# Altium PCB ShutdownBoard.PcbDoc (part 2 of 2)
Units mil, origin at the board's own origin, x right, y up, seen from the top; angles counter-clockwise.
Board outline 4429.13 x 4429.13 mil, 2 copper layers (Top Layer, Bottom Layer), stack 61.8 mil thick; 127 components, 112 nets, 478 pads, 128 vias.
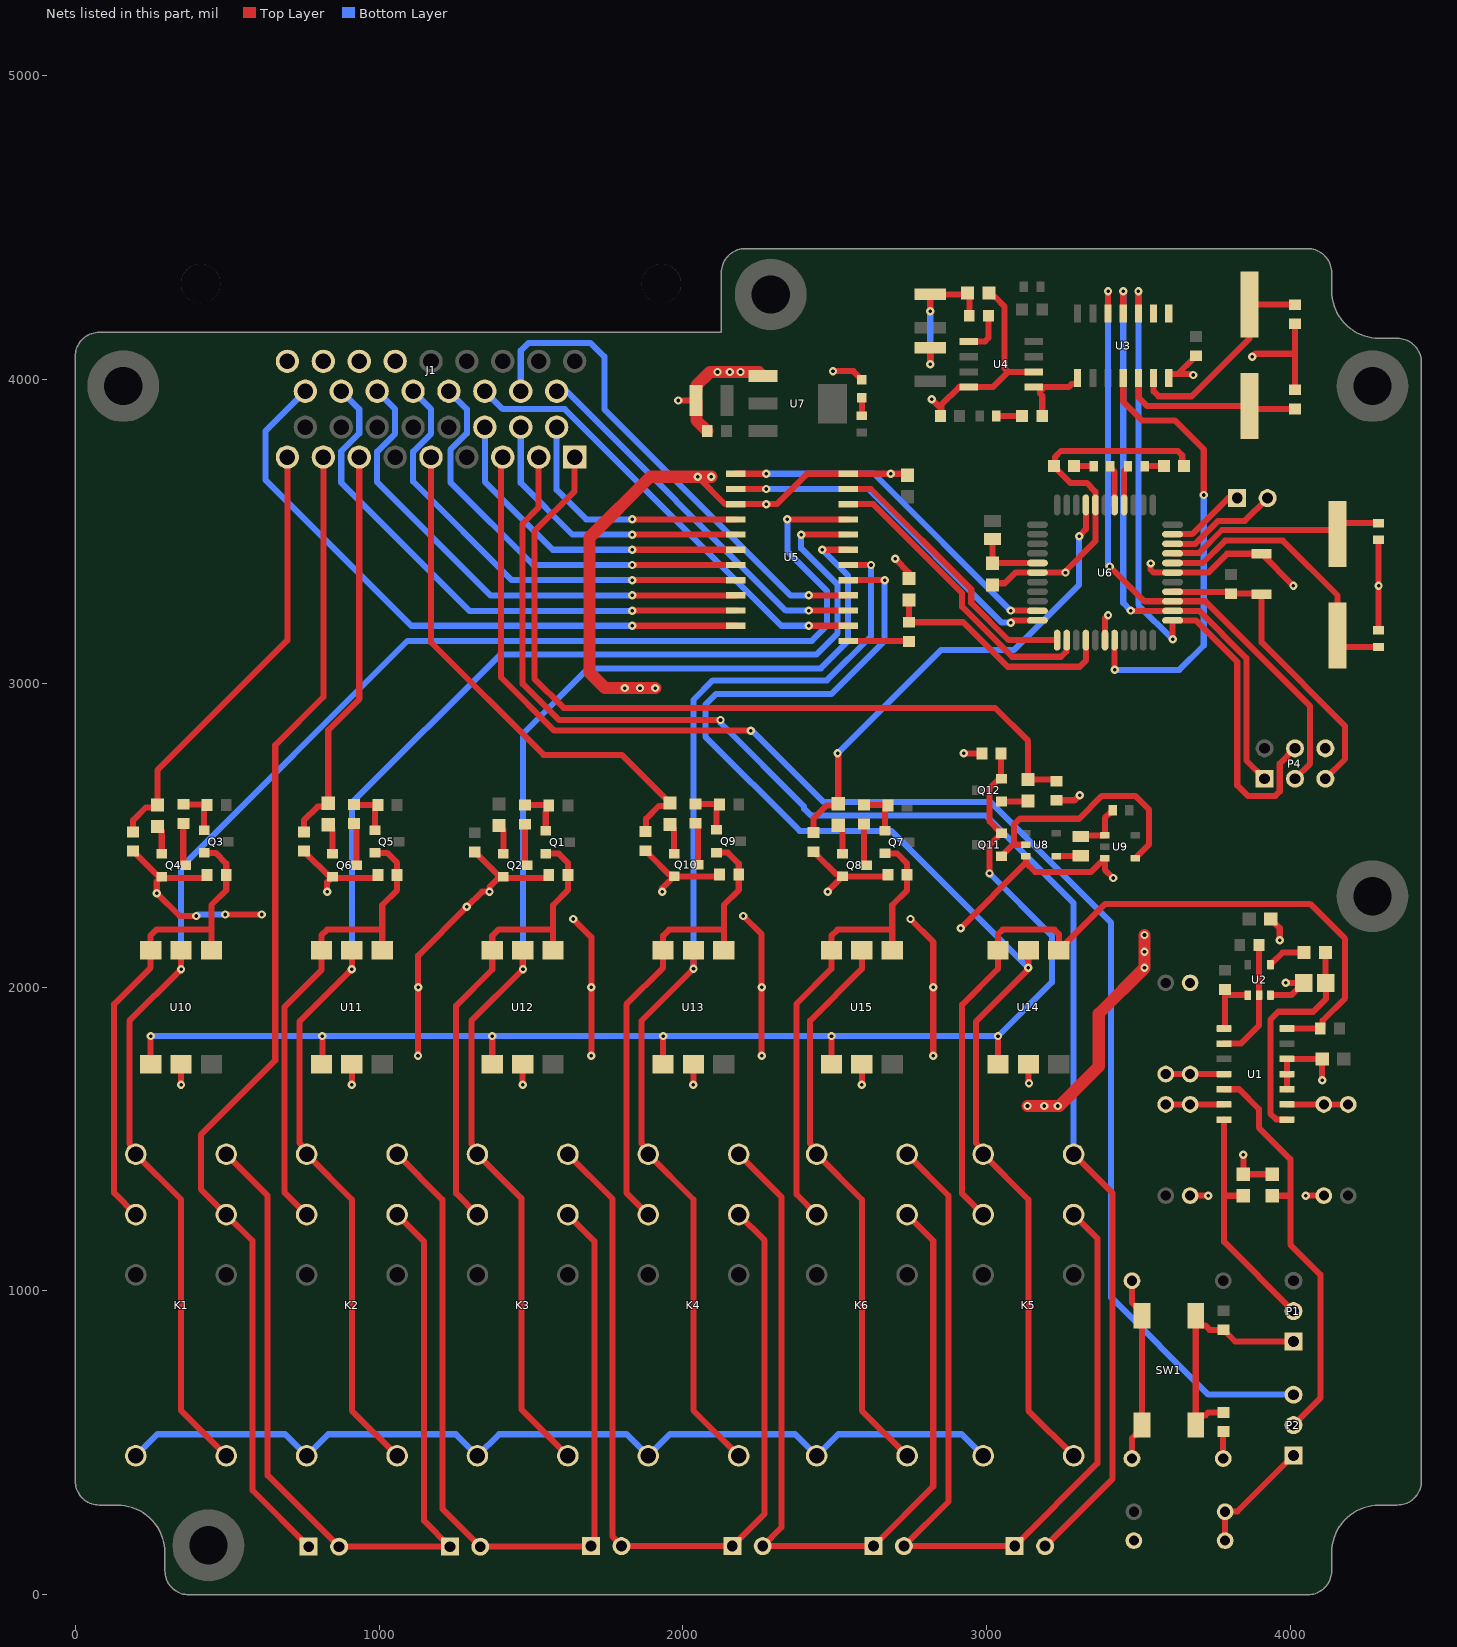
[diagram p2: the nets of this part, all layers, seen from the top]

## Via types
v1: diameter 27.56, hole 11.81, Top Layer to Bottom Layer, 128 vias

## Nets (pads, with @x,y where several pads share a name; then routed paths per layer and width w, separated by ;. In a path a pad name is that pad's centre, name@x,y a point inside that pad or via, vN(x,y) a via of type N, cw(c..) or ccw(c..) an arc to the next point about the centre after c; other vN are vias at no path point) (continued)
CAN_SPLIT: C12.2 R22.2 R23.1 R24.1 | length 487.3
  Top Layer w20: v1(2813.5,4048.6) R23.1@2813.5,4103.72 ; v1(2813.5,4223.6) R24.1@2813.5,4278.72 2931.14,4278.72 C12.2@2936.02,4283.6 2942.01,4277.62 R22.2@2942.01,4208.6
  Bottom Layer w20: v1(2813.5,4048.6) v1(2813.5,4223.6)
CAN_SPLIT_R: R22.1 U4.5 | length 142.2
  Top Layer w20: U4.5@2940.9,4123.6 2993.28,4123.6 3005,4135.32 R22.1@3005,4208.6
CAN_TX: LED1.2 U3.1 U4.1 | length 259.8
  Top Layer w20: U4.1@3153.5,3973.6 3172.2,3973.6 3174.01,3971.79 3174.01,3953.09 3181.97,3945.14 LED1.2@3181.97,3878.6 ; U4.1@3181.97,3967.07 3188.5,3973.6 3268.5,3973.6 3278.97,3984.08 3296.69,3984.08 3298.5,3985.89 U3.1@3298.5,4003.6
CAN_TX_LED: LED1.1 R25.2 | length 84
  Top Layer w20: R25.2@3031.06,3878.6 LED1.1@3115.04,3878.6
CAN_X1_20MHz: C13.2 U3.6 X1.1 | length 706.7
  Top Layer w20: U3.6@3548.5,4003.6 3548.5,3960.18 3565.08,3943.6 3673.5,3943.6 3863.5,4133.6 X1.1@3863.5,4245.93 3864.33,4245.1 C13.2@4013.5,4245.1
CAN_X2_20MHz: C14.1 U3.5 X1.2 | length 594.2
  Top Layer w20: U3.5@3498.5,4003.6 3498.5,3985.89 3500.31,3984.08 3500.31,3938.29 3527.32,3911.28 X1.2@3863.5,3911.28 3872.68,3902.11 C14.1@4013.5,3902.11
GND: C1.1 C2.1 C3.1 C4.1 C5.2 C6.1 C11.1 C12.1 C13.1 C14.2 C15.1 C16.1 C17.1 C18.1 C19.1 C20.1 DS1.2 J1.31 J1.32 J1.33 J1.34 K1.B K2.B K3.B K4.B K5.B K6.B LED3.2 LED4.2 P4.6 Q2.2 Q4.2 Q6.2 Q8.2 Q10.2 R3.1 R5.1 R8.1 R9.1 R11.1 R14.2 R19.1 R21.1 R28.1 R31.1 R33.1 R36.1 R38.1 R41.1 R44.1 R47.1 R49.1 R52.1 R54.1 SW2.1 U1.10 U1.11 U1.12 U2.3 U3.7 U4.2 U4.8 U5.12 U5.15 U6.6 U6.18 U6.28 U6.39 U7.1 U8.3 U9.3 U10.2 U11.2 U12.2 U13.2 U14.2 U15.2 | length 16312.6
  Top Layer w20: R33.1@190.82,2447.11 192.79,2447.11 200.51,2439.39 200.51,2437.42 Q4.2@274.84,2363.09 ; v1(348.5,1678.6) U10.2@348.5,1746.01 ; v1(398.5,2233.6) 343.5,2233.6 v1(268.5,2308.6) 268.5,2346.64 Q4.2@280.47,2358.6 ; R31.1@434.33,2368.6 424.33,2358.6 Q4.2@280.47,2358.6 ; v1(493.5,2238.6) v1(613.5,2238.6) ; R38.1@752.82,2447.11 754.79,2447.11 762.51,2439.39 762.51,2437.42 831.09,2368.84 841.21,2368.84 Q6.2@846.96,2363.09 ; v1(829.01,2313.6) 829.01,2345.14 Q6.2@846.96,2363.09 ; v1(910.5,1678.6) U11.2@910.5,1746.01 ; R36.1@996.33,2368.6 986.33,2358.6 851.45,2358.6 Q6.2@846.96,2363.09 ; v1(1128.11,1773.6) 1128.5,1774 v1(1128.5,1998.6) 1128.5,2103.05 v1(1289.05,2263.6) 1339.05,2313.6 v1(1363.5,2313.6) 1363.5,2329.13 Q2.2@1403.21,2368.84 ; R5.1@1314.82,2444.51 1316.79,2444.51 1324.51,2436.79 1324.51,2434.82 1390.49,2368.84 Q2.2@1403.21,2368.84 ; v1(1472.5,1678.6) U12.2@1472.5,1746.01 ; R3.1@1558.33,2368.6 1548.33,2358.6 1413.45,2358.6 Q2.2@1408.96,2363.09 Q2.2@1403.21,2368.84 ; v1(1638.5,2223.6) 1698.5,2163.6 v1(1698.5,1998.6) v1(1698.5,1773.6) ; R49.1@1876.82,2448.29 1878.79,2448.29 1886.51,2440.57 1886.51,2438.6 1955.09,2370.02 1965.21,2370.02 Q10.2@1970.96,2364.27 ; v1(1931.51,2313.6) 1931.51,2324.82 Q10.2@1970.96,2364.27 ; v1(1984.56,3929.67) C20.1@2042.32,3929.67 ; v1(2033.5,1678.6) 2034.5,1679.61 U13.2@2034.5,1746.01 ; v1(2048.5,3678.6) 2138.26,3588.84 2173.62,3588.84 U5.15@2173.86,3588.6 v1(2273.5,3588.6) 2308.5,3588.6 2408.5,3688.6 U5.12@2543.15,3688.6 v1(2683.5,3688.6) 2733.93,3688.6 C15.1@2738.5,3684.04 ; R47.1@2120.33,2369.79 2114.82,2364.27 Q10.2@1970.96,2364.27 ; v1(2198.5,2233.6) 2258.5,2173.6 v1(2258.5,1998.6) v1(2258.5,1773.6) ; R44.1@2429.49,2445.3 2431.45,2445.3 2439.17,2437.58 2439.17,2435.61 2505.16,2369.63 2519.21,2369.63 Q8.2@2524.96,2363.88 ; v1(2476.22,2313.6) 2476.22,2315.14 Q8.2@2524.96,2363.88 ; v1(2493.5,4026.46) 2560.17,4026.46 DS1.2@2588.5,3998.13 ; v1(2588.5,1678.6) U15.2@2588.5,1746.01 ; R41.1@2674.33,2369.39 2668.82,2363.88 Q8.2@2524.96,2363.88 ; v1(2698.5,3408.6) 2743.5,3363.6 R28.1@2743.5,3344.04 ; v1(2748.5,2223.6) 2823.5,2148.6 v1(2823.5,1998.6) v1(2823.5,1773.6) ; v1(2818.5,3933.6) 2850.17,3901.94 ; C11.1@2850.17,3881.77 2850.17,3901.94 ; v1(2913.5,2193.6) 3128.31,2408.41 ; v1(2923.5,2768.6) R52.1@2983.5,2768.6 R52.1@2978.5,2773.6 ; C12.1@3006.89,4283.6 3018.54,4271.95 3025.16,4271.95 3058.5,4238.6 3058.5,4034.67 3069.56,4023.6 ; C16.1@3018.5,3323.17 3023.87,3328.54 3058.44,3328.54 3093.5,3363.6 U6.28@3166.06,3363.6 v1@3253.5,3363.6 ; U8.3@3128.5,2430.38 U8.3@3128.31,2430.57 3128.31,2408.41 ; U14.2@3136.5,1746.01 3136.5,1685.6 v1(3138.5,1683.6) ; U4.2@3153.5,4023.6 3069.56,4023.6 ; R54.1@3229.14,2614.34 3288.5,2614.34 v1(3305.65,2631.48) ; v1(3233.5,1608.6) v1@3237.91,1608.6 ; v1(3258.5,3363.6) v1@3253.5,3363.6 ; U6.39@3388.5,3141.16 3388.5,3213.6 v1(3398.5,3223.6) ; v1(3415.65,2358.6) 3388.31,2385.94 U9.3@3388.31,2424.23 3383.38,2424.23 3382.56,2423.41 3382.56,2418.49 3342.68,2378.6 3158.11,2378.6 3128.31,2408.41 ; v1(3538.5,3393.6) 3538.5,3373.6 3548.5,3363.6 U6.6@3610.94,3363.6 3728.5,3363.6 3790.43,3425.53 SW2.1@3903.5,3425.53 3903.72,3425.53 v1(4008.5,3320.75) ; U3.7@3598.5,4003.6 3598.5,4015.39 3600.31,4017.2 3628.6,4017.2 ; LED3.2@3648.78,3713.6 3642.74,3719.64 3642.74,3749.36 3628.5,3763.6 3243.5,3763.6 3223.5,3743.6 3223.5,3717.07 LED4.2@3220.04,3713.61 3229.72,3703.92 3229.72,3703.2 3274.32,3658.6 3328.5,3658.6 3357.01,3630.1 U6.18@3357.01,3586.04 3357.32,3585.73 3357.32,3560.94 3357.68,3560.58 3357.68,3467.78 v1@3253.5,3363.6 ; R14.2@3668.5,1313.6 v1(3728.5,1313.6) ; v1(3678.5,4013.6) 3674.9,4017.2 3628.6,4017.2 ; C6.1@3688.5,4077.11 3686.53,4077.11 3678.82,4069.39 3678.82,4067.42 3628.6,4017.2 ; R8.1@3777.28,448.6 3777.28,535.89 R9.1@3778.5,537.11 ; v1(3843.5,1448.6) C1.1@3843.5,1384.04 C3.1@3938.5,1384.04 ; v1(3873.5,4073.6) 3883.5,4083.6 4013.5,4083.6 ; U2.3@3932.87,1973.41 4001.89,1973.41 4022.56,1994.08 4023.54,1994.08 4042.08,2012.62 C2.1@4042.08,2013.6 v1(3983.5,2013.6) ; C5.2@3933.94,2223.6 3963.5,2194.04 v1(3963.5,2153.6) ; U1.10@3986.85,1663.6 U1.11@3986.85,1713.6 U1.12@3986.85,1763.6 C4.1@4103.07,1763.6 4103.07,1694.04 v1(4103.5,1693.6) ; C14.2@4013.5,3965.1 4013.5,4083.6 ; C13.1@4013.5,4182.11 4013.5,4083.6 ; v1(4048.5,1313.17) 4048.94,1313.6 R19.1@4108.5,1313.6 ; C17.1@4288.5,3173.72 v1(4288.5,3320.75) C18.1@4288.5,3471.04 ; Q4.2@274.84,2363.09 279.33,2358.6 Q4.2@280.47,2358.6 ; Q4.2@274.84,2363.09 Q4.2@284.96,2363.09 Q4.2@280.47,2358.6 ; 2850.17,3901.94 2850.17,3915.27 2908.5,3973.6 U4.8@2940.9,3973.6 3019.56,3973.6 3069.56,4023.6
  Top Layer w40: v1(1908.5,2983.6) v1(1858.5,2983.6) v1(1808.5,2983.6) 1743.5,2983.6 1692.6,3034.51 1692.6,3478.67 1892.53,3678.6 v1(2048.5,3678.6) v1(2093.5,3678.6) ; C19.1@2079.8,3829.23 2043.97,3865.06 2043.97,3928.01 C20.1@2042.32,3929.67 2042.32,3959.19 2043.97,3960.85 2043.97,3979.08 2088.5,4023.6 v1(2113.5,4023.6) v1(2153.5,4023.6) v1(2189.23,4023.6) 2249.52,4023.6 U7.1@2263.34,4009.78 ; v1(3133.5,1608.6) v1(3188.5,1608.6) v1(3233.5,1608.6) ; v1@3237.91,1608.6 3367.91,1738.6 3367.91,1912.23 v1(3518.5,2062.82) v1(3518.5,2116.14) v1(3518.5,2171.2)
  Bottom Layer w20: K1.B@199.68,457.54 270.75,528.6 690.62,528.6 K2.B@761.68,457.54 832.75,528.6 1252.62,528.6 K3.B@1323.68,457.54 1394.75,528.6 1814.62,528.6 K4.B@1885.68,457.54 1956.75,528.6 2368.62,528.6 K6.B@2439.68,457.54 2510.75,528.6 2916.62,528.6 K5.B@2987.68,457.54 ; v1(398.5,2233.6) 403.5,2238.6 v1(493.5,2238.6) ; v1(2189.23,4023.6) 2190.19,4024.57 v1@2193.5,4024.57 ; v1@3513.5,2062.82 v1(3518.5,2062.82)
HVD_IN: J1.9 R32.1 R33.2 | length 1461.2
  Top Layer w20: R33.2@190.82,2510.1 190.82,2548.6 233.17,2590.95 262.74,2590.95 R32.1@270.82,2599.04 270.82,2713.19 698.5,3140.87 J1.9@698.5,3743.64
IMD_IN: J1.7 R37.1 R38.2 | length 1323
  Top Layer w20: R38.2@752.82,2510.1 752.82,2548.6 797.91,2593.69 822,2593.69 R37.1@832.82,2604.51 832.82,2845.38 934.72,2947.28 J1.7@934.72,3743.64
INT0: U3.4 U6.40 | length 1476.8
  Top Layer w20: U6.40@3420,3141.16 3420.31,3140.85 v1(3420.31,3043.6) ; U3.4@3448.5,4003.6 3448.5,3926.01 3510,3864.51 3617.59,3864.51 3713.5,3768.6 v1(3713.5,3618.92)
  Bottom Layer w20: v1(3420.31,3043.6) 3633.5,3043.6 3713.5,3123.6 v1(3713.5,3618.92)
INT1: U3.9
INT2: U3.8
LEM_IN_RAW: J1.3 P2.3 | length 5034.7
  Top Layer w20: J1.3@1407.16,3743.64 1401.23,3737.72 1401.23,3018.79 1576.42,2843.6 v1(2223.5,2843.6)
  Bottom Layer w20: v1(2223.5,2843.6) 2228.5,2843.6 2463.5,2608.6 3011.97,2608.6 3408.5,2212.07 3408.5,978.6 3728.5,658.6 P2.3@4008.5,658.6
MCU_AVCC: C16.2 L2.1 U6.27 | length 227.9
  Top Layer w20: L2.1@3018.54,3473.88 3018.5,3473.84 C16.2@3018.5,3394.04 3019.56,3395.1 U6.27@3166.06,3395.1
MCU_CLK: P4.3 U3.12 U6.3 | length 2089.4
  Top Layer w20: U3.12@3398.5,4216.2 v1(3398.5,4288.6) ; v1(3403.5,3383.6) 3517.99,3269.12 U6.3@3610.94,3269.12 3718.5,3269.12 4063.5,2924.12 4063.5,2735.21 P4.3@4013.5,2685.21
  Bottom Layer w20: v1(3398.5,4288.6) 3398.5,3388.6 v1(3403.5,3383.6)
MCU_LED_A: R55.1 U6.15 | length 132.8
  Top Layer w20: U6.15@3451.49,3586.04 3451.49,3696.91 3464.25,3709.67 R55.1@3464.25,3713.61
MCU_LED_B: R56.1 U6.16 | length 133.3
  Top Layer w20: R56.1@3406.06,3713.6 3406.06,3709.67 3420,3695.73 U6.16@3420,3586.04
MCU_MISO: P4.1 U3.11 U6.2 | length 1999.4
  Top Layer w20: U3.11@3448.5,4216.2 v1(3448.5,4288.6) ; v1(3473.5,3238.6) 3474.49,3237.62 U6.2@3610.94,3237.62 3698.15,3237.62 3853.5,3082.27 3853.5,2745.21 P4.1@3913.5,2685.21
  Bottom Layer w20: v1(3448.5,4288.6) 3448.5,3263.6 v1(3473.5,3238.6)
MCU_MOSI: P4.4 U3.10 U6.1 | length 2325
  Top Layer w20: U3.10@3498.5,4216.2 v1(3498.5,4288.6) ; v1(3611.26,3143.6) 3610.94,3143.92 U6.1@3610.94,3206.12 3687.22,3206.12 3823.5,3069.84 3823.5,2663.6 3858.5,2628.6 3948.5,2628.6 3963.5,2643.6 3963.5,2735.21 P4.4@4013.5,2785.21
  Bottom Layer w20: v1(3498.5,4288.6) 3498.5,3256.36 v1(3611.26,3143.6)
MCU_RESET: P4.5 R43.1 SW2.2 U6.4 | length 1043.6
  Top Layer w20: U6.4@3610.94,3300.61 3635.01,3300.61 3635.68,3299.94 3797.68,3299.94 R43.1@3803.5,3294.12 3901.06,3294.12 SW2.2@3903.5,3291.67 3903.5,3133.6 4178.5,2858.6 4178.5,2750.21 P4.5@4113.5,2685.21
MCU_XTAL_1: C18.2 U6.8 X2.2 | length 738.5
  Top Layer w20: U6.8@3610.94,3426.6 3611.26,3426.91 3636.05,3426.91 3636.4,3427.27 3697.16,3427.27 3773.5,3503.6 4140.82,3503.6 X2.2@4153.5,3490.93 4153.5,3506.64 4173.03,3526.16 C18.2@4288.5,3526.16
MCU_XTAL_2: C17.2 U6.7 X2.1 | length 941.1
  Top Layer w20: U6.7@3610.94,3395.1 3710,3395.1 3783.5,3468.6 3973.5,3468.6 4153.5,3288.6 X2.1@4153.5,3156.28 4153.5,3138.13 4173.03,3118.6 C17.2@4288.5,3118.6
NetC1_2: C1.2 P1.2 U1.7 | length 805.3
  Top Layer w20: U1.7@3780.16,1563.6 3780.16,1313.6 ; C1.2@3831.12,1324.82 3831.85,1324.82 C1.2@3843.5,1313.17 3780.59,1313.17 3780.16,1313.6 ; P1.2@4008.5,933.6 3780.16,1161.95 3780.16,1313.6
NetC2_2: C2.2 R16.2 U1.8 | length 1235
  Top Layer w20: U1.8@3986.85,1563.6 3986.02,1564.43 3952.05,1564.43 3932.87,1583.6 3932.87,1892.97 3958.5,1918.6 4073.5,1918.6 4114.92,1960.02 C2.2@4114.92,2013.6 ; C2.2@4113.94,2013.6 R16.2@4113.94,2113.6 ; C2.2@4113.94,2013.6 R16.2@4113.94,2113.6 ; C2.2@4113.94,2013.6 R16.2@4113.94,2113.6 ; C2.2@4113.94,2013.6 R16.2@4113.94,2113.6 ; C2.2@4113.94,2013.6 R16.2@4113.94,2113.6 ; C2.2@4113.94,2013.6 R16.2@4113.94,2113.6
NetC3_2: C3.2 P2.2 U1.5 | length 1364
  Top Layer w20: U1.5@3780.16,1663.6 3830,1663.6 3895,1598.6 3895,1537.11 3998.5,1433.6 3998.5,1308.6 ; C3.2@3938.5,1313.17 3993.94,1313.17 3998.5,1308.6 ; P2.2@4008.5,558.6 4097.01,647.11 4097.01,1053.6 3998.5,1152.11 3998.5,1308.6
NetC21_1: C21.1 U8.4 | length 80.4
  Top Layer w20: U8.4@3228.7,2430.57 3306.97,2430.57 C21.1@3308.5,2432.11
NetC21_2: C21.2 R51.1 U9.1 | length 176.6
  Top Layer w20: C21.2@3308.5,2495.1 3312.44,2499.04 U9.1@3388.31,2499.04 3388.31,2556.4 3405.67,2573.76 3409.6,2573.76 3413.38,2577.54 R51.1@3413.38,2581.48
NetK1_14: K1.14 K2.11 P5.2 P6.1 | length 2974
  Top Layer w20: K1.14@497.32,1449.67 633.5,1313.49 633.5,393.6 P5.2@868.5,158.6 P6.1@1233.09,158.6 1148.5,243.19 1148.5,1162.06 K2.11@1059.32,1251.24
NetK1_21: K1.21 Q3.2 R31.2 U10.4 U10.6 | length 1598.4
  Top Layer w20: K1.21@199.68,1251.24 128.5,1322.42 128.5,1943.6 248.5,2063.6 U10.6@248.5,2121.2 248.5,2170.1 267.2,2188.8 448.5,2188.8 ; Q3.2@424.49,2441.2 462.36,2441.2 497.32,2406.24 R31.2@497.32,2368.6 497.32,2318.6 448.5,2269.79 448.5,2188.8 ; U10.4@448.5,2121.2 448.5,2188.8
NetK2_14: K2.14 K3.11 P6.2 P7.1 | length 2901.2
  Top Layer w20: K2.14@1059.32,1449.67 1208.5,1300.49 1208.5,283.19 P6.2@1333.09,158.6 1695.85,158.6 P7.1@1697.68,160.43 1708.5,171.25 1708.5,1164.06 K3.11@1621.32,1251.24
NetK2_21: K2.21 Q5.2 R36.2 U11.4 U11.6 | length 1601.1
  Top Layer w20: K2.21@761.68,1251.24 688.5,1324.42 688.5,1933.6 810.5,2055.61 U11.6@810.5,2121.2 810.5,2170.1 829.01,2188.6 1010.5,2188.6 ; Q5.2@986.49,2441.2 1026.33,2441.2 1059.32,2408.21 R36.2@1059.32,2368.6 1059.32,2318.6 1010.5,2269.79 1010.5,2188.6 ; U11.4@1010.5,2121.2 1010.5,2188.6
NetK3_14: K3.14 K4.11 P7.2 P8.1 | length 2897
  Top Layer w20: K3.14@1621.32,1449.67 1768.5,1302.49 1768.5,191.67 1797.68,162.5 P7.2@1797.68,160.43 P8.1@2162.26,160.43 2268.5,266.67 2268.5,1166.06 K4.11@2183.32,1251.24
NetK3_21: K3.21 Q1.2 R3.2 U12.4 U12.6 | length 1596.9
  Top Layer w20: K3.21@1323.68,1251.24 1253.5,1321.42 1253.5,1938.6 1372.5,2057.61 U12.6@1372.5,2121.2 1372.5,2168.6 1392.5,2188.6 1572.5,2188.6 ; Q1.2@1548.49,2438.6 1591.32,2438.6 1621.32,2408.6 R3.2@1621.32,2368.6 1621.32,2318.6 1572.5,2269.79 1572.5,2188.6 ; U12.4@1572.5,2121.2 1572.5,2188.6
NetK4_14: K4.14 K6.11 P8.2 P10.1 | length 2945.2
  Top Layer w20: K4.14@2183.32,1449.67 2323.5,1309.49 2323.5,221.67 P8.2@2262.26,160.43 P10.1@2626.85,160.43 2823.5,357.08 2823.5,1165.06 K6.11@2737.32,1251.24
NetK4_21: K4.21 Q9.2 R47.2 U13.4 U13.6 | length 1599
  Top Layer w20: K4.21@1885.68,1251.24 1813.5,1323.42 1813.5,1942.6 1934.5,2063.6 U13.6@1934.5,2121.2 1934.5,2168.6 1954.5,2188.6 2134.5,2188.6 ; Q9.2@2110.49,2442.38 2147.36,2442.38 2183.5,2406.24 2183.5,2369.97 R47.2@2183.32,2369.79 2183.32,2318.6 2134.5,2269.79 2134.5,2188.6 ; U13.4@2134.5,2121.2 2134.5,2188.6
NetK5_11: K5.11 K6.14 P9.1 P10.2 | length 3006.9
  Top Layer w20: K6.14@2737.32,1449.67 2873.5,1313.49 2873.5,307.08 P10.2@2726.85,160.43 P9.1@3091.44,160.43 3363.5,432.49 3363.5,1173.06 K5.11@3285.32,1251.24
NetK5_21: K5.21 R15.1 U1.14 U14.4 U14.6 | length 2756.4
  Top Layer w20: K5.21@2987.68,1251.24 2918.5,1320.42 2918.5,1941.6 3036.5,2059.61 U14.6@3036.5,2121.2 3036.5,2173.6 3051.5,2188.6 3221.5,2188.6 3236.5,2173.6 U14.4@3236.5,2121.2 3388.91,2273.6 3784.96,2273.6 4063.5,2273.6 4178.5,2158.6 4178.5,1963.6 4104.72,1889.82 4104.72,1871.32 R15.1@4097.01,1863.6 U1.14@3986.85,1863.6
NetK6_21: K6.21 Q7.2 R41.2 U15.4 U15.6 | length 1592.5
  Top Layer w20: K6.21@2439.68,1251.24 2373.5,1317.42 2373.5,1944.6 2488.5,2059.61 U15.6@2488.5,2121.2 2488.5,2168.6 2508.5,2188.6 2688.5,2188.6 ; Q7.2@2664.49,2439.39 2704.17,2439.39 2737.32,2406.24 R41.2@2737.32,2369.39 2737.32,2318.61 2688.5,2269.79 2688.5,2188.6 ; U15.4@2688.5,2121.2 2688.5,2188.6
NetK6_24: K6.24 K6.A U15.5 | length 1866.1
  Top Layer w20: U15.5@2588.5,2121.2 2588.5,2059.61 2418.5,1889.6 2418.5,1484.61 2439.68,1463.43 K6.24@2439.68,1449.67 2588.5,1300.85 2588.5,606.36 K6.A@2737.32,457.54
NetLED3_1: LED3.1 R55.2 | length 62.5
  Top Layer w20: R55.2@3519.37,3713.61 LED3.1@3581.85,3713.6
NetLED4_1: LED4.1 R56.2 | length 64
  Top Layer w20: LED4.1@3286.97,3713.61 R56.2@3350.94,3713.6
NetP1_1: P1.1 R7.1 R9.2 SW1.3 SW1.4 | length 798.7
  Top Layer w20: SW1.4@3687,559.1 SW1.4@3687,573.1 ; SW1.3@3687,918.1 SW1.3@3687,904.1 ; R9.2@3778.5,600.1 3728,600.1 3718.5,590.6 3704.5,590.6 SW1.4@3687,573.1 ; R7.1@3778.5,872.11 3733,872.11 3718.5,886.6 3704.5,886.6 SW1.3@3687,904.1 ; R7.1@3788.19,862.42 3817.01,833.6 P1.1@4008.5,833.6 ; SW1.4@3687,573.1 SW1.3@3687,904.1
NetP2_1: P2.1 R10.1 R11.2 | length 396.6
  Top Layer w20: R11.2@3783.5,178.6 R10.1@3783.5,273.6 3784.2,274.3 3824.2,274.3 P2.1@4008.5,458.6
NetP3_1: P3.1 U6.10 | length 261.9
  Top Layer w20: U6.10@3610.94,3489.59 3611.26,3489.9 3636.05,3489.9 3636.4,3490.26 3675.3,3490.26 3793.65,3608.6 P3.1@3823.5,3608.6
NetP3_2: P3.2 U6.9 | length 374.9
  Top Layer w20: U6.9@3610.94,3458.09 3685.56,3458.09 3761.08,3533.6 3848.5,3533.6 P3.2@3923.5,3608.6
NetQ1_1: Q1.1 R1.1 R2.2 | length 166.4
  Top Layer w20: R2.2@1479.82,2598.41 1556.36,2598.41 R1.1@1558.33,2596.44 1550.61,2588.72 1550.61,2577.16 1548.49,2575.04 Q1.1@1548.49,2513.41
NetQ2_1: Q2.1 R4.2 | length 99.4
  Top Layer w20: R4.2@1394.82,2531.48 1408.96,2517.34 Q2.1@1408.96,2437.9
NetQ2_3: Q2.3 R2.1 | length 139.3
  Top Layer w20: R2.1@1479.82,2535.42 1479.82,2417.96 1479.98,2417.8 1479.98,2406.24 1485.73,2400.49 Q2.3@1487.7,2400.49
NetQ3_1: Q3.1 R29.1 R30.2 | length 166.4
  Top Layer w20: R30.2@355.82,2601.01 432.36,2601.01 R29.1@434.33,2599.04 434.33,2597.07 424.49,2587.23 Q3.1@424.49,2516.01
NetQ4_1: Q4.1 R32.2 | length 96.1
  Top Layer w20: R32.2@270.82,2528.17 284.96,2514.04 Q4.1@284.96,2437.9
NetQ4_3: Q4.3 R30.1 | length 141.9
  Top Layer w20: R30.1@355.82,2538.01 355.82,2408.37 355.98,2408.21 355.98,2406.24 361.73,2400.49 Q4.3@363.7,2400.49
NetQ5_1: Q5.1 R34.1 R35.2 | length 166
  Top Layer w20: R35.2@917.82,2600.57 919.79,2598.6 R34.1@996.33,2598.6 996.33,2596.64 986.49,2586.79 Q5.1@986.49,2516.01
NetQ6_1: Q6.1 R37.2 | length 101.6
  Top Layer w20: R37.2@832.82,2533.64 846.96,2519.51 Q6.1@846.96,2437.9
NetQ6_3: Q6.3 R35.1 | length 140.4
  Top Layer w20: R35.1@917.82,2537.58 917.98,2537.58 925.7,2529.87 Q6.3@925.7,2400.49
NetQ7_1: Q7.1 R39.1 R40.2 | length 166.4
  Top Layer w20: R40.2@2595.82,2599.2 2672.36,2599.2 R39.1@2674.33,2597.23 2674.33,2595.26 2664.49,2585.42 Q7.1@2664.49,2514.2
NetQ8_1: Q8.1 R42.2 | length 99.4
  Top Layer w20: R42.2@2510.82,2532.27 2524.96,2518.13 Q8.1@2524.96,2438.68
NetQ8_3: Q8.3 R40.1 | length 139.3
  Top Layer w20: R40.1@2595.82,2536.2 2595.82,2409.16 2595.98,2409 2595.98,2407.03 2601.73,2401.28 Q8.3@2603.7,2401.28
NetQ9_1: Q9.1 R45.1 R46.2 | length 166
  Top Layer w20: R46.2@2041.82,2601.75 2118.36,2601.75 R45.1@2120.33,2599.79 2120.33,2597.82 2110.49,2587.98 Q9.1@2110.49,2517.19
NetQ10_1: Q10.1 R48.2 | length 101.6
  Top Layer w20: R48.2@1956.82,2534.82 1970.96,2520.69 Q10.1@1970.96,2439.08
NetQ10_3: Q10.3 R46.1 | length 140.4
  Top Layer w20: R46.1@2041.82,2538.76 2041.98,2538.76 2049.7,2531.05 Q10.3@2049.7,2401.68
NetQ11_1: Q11.1 U8.2 U9.4 | length 848
  Top Layer w20: Q11.1@3047.87,2430.57 3049.84,2430.57 3055.59,2436.32 3055.59,2438.29 3085.27,2467.98 ; U8.2@3128.31,2467.98 3085.27,2467.98 ; U9.4@3488.7,2424.23 3493.62,2424.23 3494.45,2425.06 3494.45,2429.98 3533.5,2469.04 3533.5,2583.8 3488.7,2628.6 3378.5,2628.6 3303.5,2553.6 3108.5,2553.6 3088.5,2533.6 3088.5,2471.2 3085.27,2467.98
NetQ12_1: Q12.1 R53.2 | length 88.6
  Top Layer w20: Q12.1@3047.6,2610.4 3133.39,2610.4 R53.2@3135.36,2612.37
NetR6_1: R6.1 R8.2 SW1.1 SW1.2 | length 616.2
  Top Layer w20: R8.2@3477.28,448.6 3477.28,515.89 3489,527.6 3492.5,527.6 3510,545.1 SW1.2@3510,559.1 SW1.1@3510,918.1 3510,932.1 3492.5,949.6 3489,949.6 3477.28,961.32 R6.1@3477.28,1033.6
NetR12_1: R12.1 U1.1 U2.1 | length 184.4
  Top Layer w20: U1.1@3780.16,1863.6 3782.68,1863.6 3783.5,1864.43 3783.5,1968.6 3788.31,1973.41 U2.1@3858.07,1973.41
NetR13_2: R13.2 R14.1 U1.6 | length 191.7
  Top Layer w20: R13.2@3588.5,1613.6 R14.1@3668.5,1613.6 U1.6@3780.16,1613.6
NetR16_1: R16.1 U2.4 | length 129.6
  Top Layer w20: U2.4@3932.87,2073.8 3932.87,2078.72 3933.7,2079.55 3938.62,2079.55 3972.68,2113.6 R16.1@4043.07,2113.6
NetR17_1: R17.1 R19.2 U1.9 | length 201.7
  Top Layer w20: U1.9@3986.85,1613.6 R19.2@4108.5,1613.6 R17.1@4188.5,1613.6
NetR18_1: R18.1 U1.2 U2.2 | length 405.4
  Top Layer w20: U1.2@3780.16,1813.6 3835.47,1813.6 3895.47,1873.6 U2.2@3895.47,1973.41 3895,1973.88 R18.1@3895,2138.6
NetR20_1: R20.1 R21.2 U1.4 | length 191.7
  Top Layer w20: R20.1@3588.5,1713.6 R21.2@3668.5,1713.6 U1.4@3780.16,1713.6
NetR27_1: R27.1 R28.2 U6.37 | length 791.6
  Top Layer w20: R28.2@2743.5,3273.17 R27.1@2743.5,3200.1 2922.01,3200.1 3068.5,3053.6 3305.51,3053.6 3325.51,3073.6 U6.37@3325.51,3141.16
NetR27_2: R27.2 U5.1 | length 201
  Top Layer w20: U5.1@2543.15,3138.6 2742.01,3138.6 R27.2@2743.5,3137.11
NetR42_1: R42.1 R44.2 U6.19 | length 1610.6
  Top Layer w20: R44.2@2429.49,2508.29 2429.49,2554.59 2471.56,2596.66 2504.35,2596.66 R42.1@2510.82,2603.13 2510.82,2766.28 v1(2508.5,2768.6) ; v1(3303.5,3483.6) 3325.51,3505.61 U6.19@3325.51,3586.04
  Bottom Layer w20: v1(2508.5,2768.6) 2848.5,3108.6 3088.5,3108.6 3303.5,3323.6 v1(3303.5,3483.6)
NetU3_10: 
NetU3_11: 
NetU3_12: 
NetU3_13: 
NetU5_10: U5.10 U6.35 | length 997.1
  Top Layer w20: U5.10@2543.15,3588.6 2626.08,3588.6 2918.5,3296.18 2918.5,3251.18 3082.96,3086.72 3243.79,3086.72 3261.85,3104.77 3261.85,3115.7 3262.2,3116.06 3262.2,3140.85 U6.35@3262.52,3141.16
NetU5_11: U5.11 U6.34 | length 920.3
  Top Layer w20: U5.11@2543.15,3638.6 2618.5,3638.6 2948.5,3308.6 2948.5,3263.6 3070.94,3141.16 U6.34@3231.02,3141.16
NetU5_13: U5.13 U6.32 | length 1179
  Top Layer w20: U5.13@2173.86,3688.6 v1(2273.5,3688.6) ; v1(3078.5,3238.6) 3078.82,3238.29 3140.6,3238.29 3140.95,3237.94 3165.75,3237.94 U6.32@3166.06,3237.62
  Bottom Layer w20: v1(2273.5,3688.6) 2628.5,3688.6 v1(3078.5,3238.6)
NetU5_14: U5.14 U6.33 | length 1177.6
  Top Layer w20: U5.14@2173.86,3638.6 v1(2273.5,3638.6) ; v1(3078.82,3198.6) 3086.34,3206.12 3141.99,3206.12 U6.33@3166.06,3206.12
  Bottom Layer w20: v1(2273.5,3638.6) 2608.87,3638.6 3048.87,3198.6 v1(3078.82,3198.6)
NetU6_40: 
PDOC_IN: J1.5 R48.1 R49.2 | length 1757.1
  Top Layer w20: J1.5@1170.94,3743.64 1170.94,3134.09 1541.42,2763.6 1798.91,2763.6 R48.1@1956.82,2605.69 1946.93,2595.8 1920.98,2595.8 1878.79,2553.6 1878.79,2513.25 R49.2@1876.82,2511.28
PWR_ONLED: DS1.1 R50.2 | length 59.4
  Top Layer w20: R50.2@2588.5,3879.63 DS1.1@2588.5,3939.08
SHDN_BMS: K3.24 K3.A U5.7 U12.5 | length 4257.9
  Top Layer w20: U12.5@1472.5,2121.2 v1@1472.5,2057.61 ; v1(1473.5,2058.6) v1@1472.5,2057.61 ; K3.A@1621.32,457.54 1468.5,610.36 1468.5,1304.85 K3.24@1323.68,1449.67 1323.68,1463.43 1303.5,1483.61 1303.5,1888.6 v1@1472.5,2057.61 ; v1(2458.5,3438.6) U5.7@2543.15,3438.6
  Bottom Layer w20: v1(1473.5,2058.6) 1473.5,2833.6 1688.5,3048.6 2453.5,3048.6 2543.5,3138.6 2543.5,3353.6 v1(2458.5,3438.6)
SHDN_BPSD: K5.24 K5.A U5.5 U14.5 | length 4349.1
  Top Layer w20: U5.5@2543.15,3338.6 v1(2663.5,3338.6) ; U14.5@3136.5,2121.2 3136.5,2058.6 2963.5,1885.6 2963.5,1486.82 2987.68,1462.63 K5.24@2987.68,1449.67 3136.5,1300.85 3136.5,606.36 K5.A@3285.32,457.54
  Bottom Layer w20: v1(2663.5,3338.6) 2663.5,3138.6 2488.5,2963.6 2108.5,2963.6 2073.5,2928.6 2073.5,2823.6 2383.5,2513.6 2685.72,2513.6 v1(3136.5,2062.82)
SHDN_DASH_INERTIA: J1.25 U5.23 | length 2092.3
  Top Layer w20: v1(1833.5,3188.6) U5.23@2173.86,3188.6
  Bottom Layer w20: J1.25@757.56,3960.18 626.23,3828.86 626.23,3668.79 1106.42,3188.6 v1(1833.5,3188.6)
SHDN_ESTOP_DASH: J1.24 U5.22 | length 1823
  Top Layer w20: v1(1833.5,3237.62) 1834.49,3238.6 U5.22@2173.86,3238.6
  Bottom Layer w20: J1.24@875.67,3960.18 934.72,3901.12 934.72,3821.67 875.67,3762.62 875.67,3659.36 1297.41,3237.62 v1(1833.5,3237.62)
SHDN_ESTOP_LEFT: J1.22 U5.20 | length 1542.6
  Top Layer w20: v1(1833.5,3338.6) U5.20@2173.86,3338.6
  Bottom Layer w20: J1.22@1111.89,3960.18 1171.23,3900.83 1171.23,3820.85 1111.89,3761.5 1111.89,3663.14 1436.42,3338.6 v1(1833.5,3338.6)
SHDN_ESTOP_RIGHT: J1.23 U5.21 | length 1682.3
  Top Layer w20: v1(1833.5,3288.6) U5.21@2173.86,3288.6
  Bottom Layer w20: J1.23@993.78,3960.18 1052.83,3901.12 1052.83,3820.56 993.78,3761.5 993.78,3661.25 1366.42,3288.6 v1(1833.5,3288.6)
SHDN_EXTRA_A: J1.10 U5.16 | length 827.8
  Top Layer w20: v1(1833.5,3538.6) U5.16@2173.86,3538.6
  Bottom Layer w20: J1.10@1584.33,3833.79 1584.33,3635.7 1681.42,3538.6 v1(1833.5,3538.6)
SHDN_EXTRA_B: J1.11 U5.17 | length 961.4
  Top Layer w20: v1(1833.5,3488.6) U5.17@2173.86,3488.6
  Bottom Layer w20: J1.11@1466.22,3842.07 1466.22,3658.79 1636.41,3488.6 v1(1833.5,3488.6)
SHDN_EXTRA_C: J1.12 U5.18 | length 1098.4
  Top Layer w20: v1(1833.5,3438.6) U5.18@2173.86,3438.6
  Bottom Layer w20: J1.12@1348.11,3842.07 1348.11,3661.92 1571.42,3438.6 v1(1833.5,3438.6)
SHDN_HVD: K1.24 K1.A U5.9 U10.5 | length 5321.5
  Top Layer w20: K1.A@497.32,457.54 348.5,606.36 348.5,1300.85 K1.24@199.68,1449.67 199.68,1463.43 178.5,1484.61 178.5,1888.6 v1(348.5,2058.6) ; v1(2343.5,3538.6) U5.9@2543.15,3538.6 ; v1(348.5,2058.6) U10.5@348.5,2121.2 v1(348.5,2058.6)
  Bottom Layer w20: v1(348.5,2058.6) 348.5,2393.6 1093.5,3138.6 2423.5,3138.6 2473.5,3188.6 2473.5,3303.6 2343.5,3433.6 v1(2343.5,3538.6)
SHDN_IMD: K2.24 K2.A U5.8 U11.5 | length 4773.3
  Top Layer w20: U11.5@910.5,2121.2 v1(910.5,2058.61) 738.5,1886.6 738.5,1486.61 761.68,1463.43 K2.24@761.68,1449.67 910.5,1300.85 910.5,606.36 K2.A@1059.32,457.54 ; v1(2388.5,3488.6) U5.8@2543.15,3488.6
  Bottom Layer w20: v1(910.5,2058.61) 910.5,2605.61 1398.5,3093.6 2438.5,3093.6 2508.5,3163.6 2508.5,3323.6 2388.5,3443.6 v1(2388.5,3488.6)
SHDN_PDOC: K4.24 K4.A U5.6 U13.5 | length 3732.9
  Top Layer w20: U13.5@2034.5,2121.2 v1(2034.5,2059.61) 1863.5,1888.6 1863.5,1485.61 1885.68,1463.43 K4.24@1885.68,1449.67 2034.5,1300.85 2034.5,606.36 K4.A@2183.32,457.54 ; U5.6@2543.15,3388.6 v1(2618.5,3388.6)
  Bottom Layer w20: v1(2034.5,2059.61) 2034.5,2944.61 2098.5,3008.6 2473.5,3008.6 2618.5,3153.6 v1(2618.5,3388.6)
SHDN_RESET: Q11.2 Q12.2 R52.2 U10.1 U11.1 U12.1 U13.1 U14.1 U15.1 | length 4487.9
  Top Layer w20: U10.1@248.5,1746.01 v1(248.5,1838.6) ; U11.1@810.5,1746.01 813.5,1749.01 v1(813.5,1838.6) ; U12.1@1372.5,1746.01 v1(1372.5,1838.6) ; U13.1@1934.5,1746.01 v1(1934.5,1838.6) ; U15.1@2488.5,1746.01 v1(2488.5,1838.6) ; v1(3008.5,2373.6) 3008.5,2466.01 Q11.2@3047.87,2505.38 3045.9,2505.38 3040.16,2511.13 3040.16,2513.09 3008.5,2544.75 3008.5,2653.6 3034.36,2679.46 3041.85,2679.46 Q12.2@3047.6,2685.21 3046.49,2686.31 R52.2@3046.49,2768.6 ; U14.1@3036.5,1746.01 v1(3036.5,1838.6)
  Bottom Layer w20: v1(248.5,1838.6) v1(813.5,1838.6) v1(1372.5,1838.6) v1(1934.5,1838.6) v1(2488.5,1838.6) v1(3036.5,1838.6) 3213.5,2015.6 3213.5,2168.6 v1(3008.5,2373.6)
SHDN_UPRIGHT_BL: J1.20 U5.2 | length 1514.6
  Top Layer w20: v1(2413.5,3188.6) U5.2@2543.15,3188.6
  Bottom Layer w20: J1.20@1348.11,3960.18 1407.16,3901.12 1610.98,3901.12 2323.5,3188.6 v1(2413.5,3188.6)
SHDN_UPRIGHT_BR: J1.21 U5.19 | length 1398.6
  Top Layer w20: v1(1833.5,3388.6) U5.19@2173.86,3388.6
  Bottom Layer w20: J1.21@1230,3960.18 1289.05,3901.12 1289.05,3821.67 1234.67,3767.29 1234.67,3660.36 1506.42,3388.6 v1(1833.5,3388.6)
SHDN_UPRIGHT_FL: J1.18 U5.3 | length 1257.7
  Top Layer w20: v1(2413.5,3238.6) U5.3@2543.15,3238.6
  Bottom Layer w20: J1.18@1584.33,3960.18 1616.93,3960.18 2338.5,3238.6 v1(2413.5,3238.6)
SHDN_UPRIGHT_FR: J1.19 U5.4 | length 1672.7
  Top Layer w20: v1(2413.5,3288.6) U5.4@2543.15,3288.6
  Bottom Layer w20: J1.19@1470.92,3964.88 J1.19@1466.22,3960.18 1466.22,4093.78 1491.23,4118.79 1696.23,4118.79 1741.23,4073.79 1741.23,3900.87 2353.5,3288.6 v1(2413.5,3288.6)
SHUTDOWN_IN: J1.8 K1.11 P5.1 | length 3899.1
  Top Layer w20: P5.1@768.5,158.6 583.5,343.6 583.5,1165.06 K1.11@497.32,1251.24 413.5,1335.06 413.5,1513.6 658.5,1758.6 658.5,2796.06 816.61,2954.17 J1.8@816.61,3743.64
SHUTDOWN_OUT: J1.2 K5.14 P9.2 | length 5150.3
  Top Layer w20: J1.2@1525.27,3743.64 1525.27,3577.83 1472.5,3525.06 1472.5,2997.52 1591.42,2878.6 v1(2123.5,2878.6) ; P9.2@3191.44,160.43 3413.38,382.37 3413.38,1321.6 K5.14@3285.32,1449.67
  Bottom Layer w20: v1(2123.5,2878.6) 2123.5,2868.6 2398.72,2593.38 2398.72,2586.27 2421.39,2563.6 2997.77,2563.6 3285.32,2276.05 K5.14@3285.32,1449.67
SHUTDOWN_RESET: J1.1 R53.1 R54.2 | length 2715.3
  Top Layer w20: J1.1@1643.38,3743.64 1643.38,3630.94 1511.23,3498.79 1511.23,3014.87 1607.5,2918.6 3026.5,2918.6 3135.36,2809.75 R53.1@3135.36,2683.24 3223.23,2683.24 R54.2@3229.14,2677.33
pads on no net: J1.13 J1.14 J1.15 J1.30 J1.None K1.12 K1.22 K2.12 K2.22 K3.12 K3.22 K4.12 K4.22 K5.12 K5.22 K6.12 K6.22 U1.13 U3.3 U6.11 U6.12 U6.13 U6.14 U6.20 U6.21 U6.22 U6.23 U6.24 U6.25 U6.26 U6.29 U6.30 U6.31 U6.36 U6.41 U6.42 U6.44 U9.2 U10.3 U11.3 U12.3 U13.3 U14.3 U15.3

## Polygon pours and split planes (outlines as drawn)
+5 on Top Layer "Top Layer-+5V" (solid, remove dead copper, pour order 0): 2428.97,4393.79 4081.23,4393.79 4081.23,4075.24 4385.2,4075.24 4385.2,367.75 4081.23,338.79 4081.23,63.79 331.23,63.79 331.23,338.79 56.23,338.79 56.23,3838.79 331.23,3838.79 331.23,4128.79 2428.97,4128.79
GND on Bottom Layer "Bottom Layer-GND" (solid, remove dead copper, pour order 2): 2431.23,4398.79 4083.5,4398.79 4083.5,4075.05 4386.23,4075.05 4386.23,366.34 4083.5,338.6 4083.5,63.6 333.5,63.6 333.5,338.6 58.5,338.6 58.5,3838.6 333.5,3838.6 333.5,4128.6 2431.23,4128.6

## Silkscreen, mask and mechanical layers (free items; w line width, h text height)
Top Overlay:
  lines w10: 628.5,1538.6 628.5,2938.6 ; 1187.25,1532.1 1187.25,2932.1 ; 1746,1532.1 1746,2932.1 ; 2304.75,1528.6 2304.75,2928.6 ; 2863.5,1528.6 2863.5,2928.6 ; 2863.5,2313.6 3558.5,2313.6 3559.01,2313.6 3686.26,2440.85 4356.26,2440.85
  text "UART" at 3763.5,3473.6 h60
  text "QUT Motorsport" at 188.5,3373.6 h60
  text "Shutdown Board V2" at 188.5,3263.6 h60
  text "RESET" at 3728.5,3178.6 h60
  text "2019 Rev A" at 188.5,3163.6 h60
  text "ISP" at 3938.5,2878.6 h60
  text "HVD" at 268.53,2843.6 h60
  text "IMD" at 835.53,2843.6 h60
  text "BMS" at 1392.53,2843.6 h60
  text "PDOC" at 1924.54,2843.6 h60
  text "Software" at 2368.57,2843.6 h60
  text "Reset" at 2963.5,2843.6 h60
  text "BPSD" at 3865.47,2328.6 h60
  text "Bottom" at 3658.5,1916.92 h20 r270
  text "Top" at 3581.84,1890.26 h20 r270
  text "LEM" at 3518.5,1873.6 h50 r90
  text "Bottom" at 4098.5,1516.92 h20 r270
  text "Top" at 4181.84,1495.26 h20 r270
  text "Top" at 3595.17,1436.95 h20 r90
  text "Bottom" at 3678.5,1410.29 h20 r90
  text "BRK PRS" at 3518.5,1293.6 h50 r90
  text "TRIG LVL" at 4363.51,1288.6 h50 r90
  text "Top" at 3600.62,1026.94 h20
  text "BRK" at 4363.5,853.67 h50 r90.07
  text "LEM" at 4363.5,478.67 h50 r90.07
  text "Bottom" at 3573.97,438.61 h20
  text "Top" at 3606.84,266.94 h20
  text "HVD" at 720.56,238.6 h32
  text "IMD" at 1185.15,238.6 h32
  text "PDOC" at 2114.33,238.6 h32
  text "Software" at 2578.91,238.6 h32
  text "BPSD" at 3043.5,238.6 h32
  text "BMS" at 1643.74,232.6 h32
  text "Bottom" at 3580.19,168.61 h20
Bottom Overlay:
  lines w10: 100.47,555.87 100.47,953.6 3383.5,953.6 3383.5,555.72 100.62,555.72 100.47,555.87
  text "Mechanical Block Mount" at 2468.5,723.6 h60
BoardOutline:
  lines w10: 0.25,374.27 ccw(c78.99,374.27) 78.99,295.53 138.05,295.53 cw(c138.05,138.05) 295.53,138.05 295.53,78.99 ccw(c374.27,78.99) 374.27,0.25 4055.37,0.25 ccw(c4055.37,78.99) 4134.11,78.99 4134.11,138.05 cw(c4291.59,138.05) 4291.59,295.53 4350.64,295.53 ccw(c4350.64,374.27) 4429.38,374.27 4429.38,4055.37 ccw(c4350.64,4055.37) 4350.64,4134.11 4291.59,4134.11 cw(c4291.59,4291.59) 4134.11,4291.59 4134.11,4350.64 ccw(c4055.37,4350.64) 4055.37,4429.38 2204.97,4429.38 ccw(c2204.97,4350.64) 2126.23,4350.64 2126.23,4153.79 78.99,4153.79 ccw(c78.99,4075.05) 0.25,4075.05 0.25,374.27

## Text inside footprints (layer, text, board x,y; h text height)
P4: Top Overlay "6" at 4173.5,2765.2 h50; Top Overlay "5" at 4173.5,2665.2 h50; Top Overlay "2" at 3813.5,2765.2 h50; Top Overlay "1" at 3833.5,2665.2 h50